# Altium PCB PCB.PcbDoc
Units mil, origin at the board's own origin, x right, y up, seen from the top; angles counter-clockwise.
Board outline 6000 x 4000 mil, 2 copper layers (Top Layer, Bottom Layer); 32 components, 24 nets, 148 pads, 25 vias.
Unrouted connection lines stored in the file: 84.
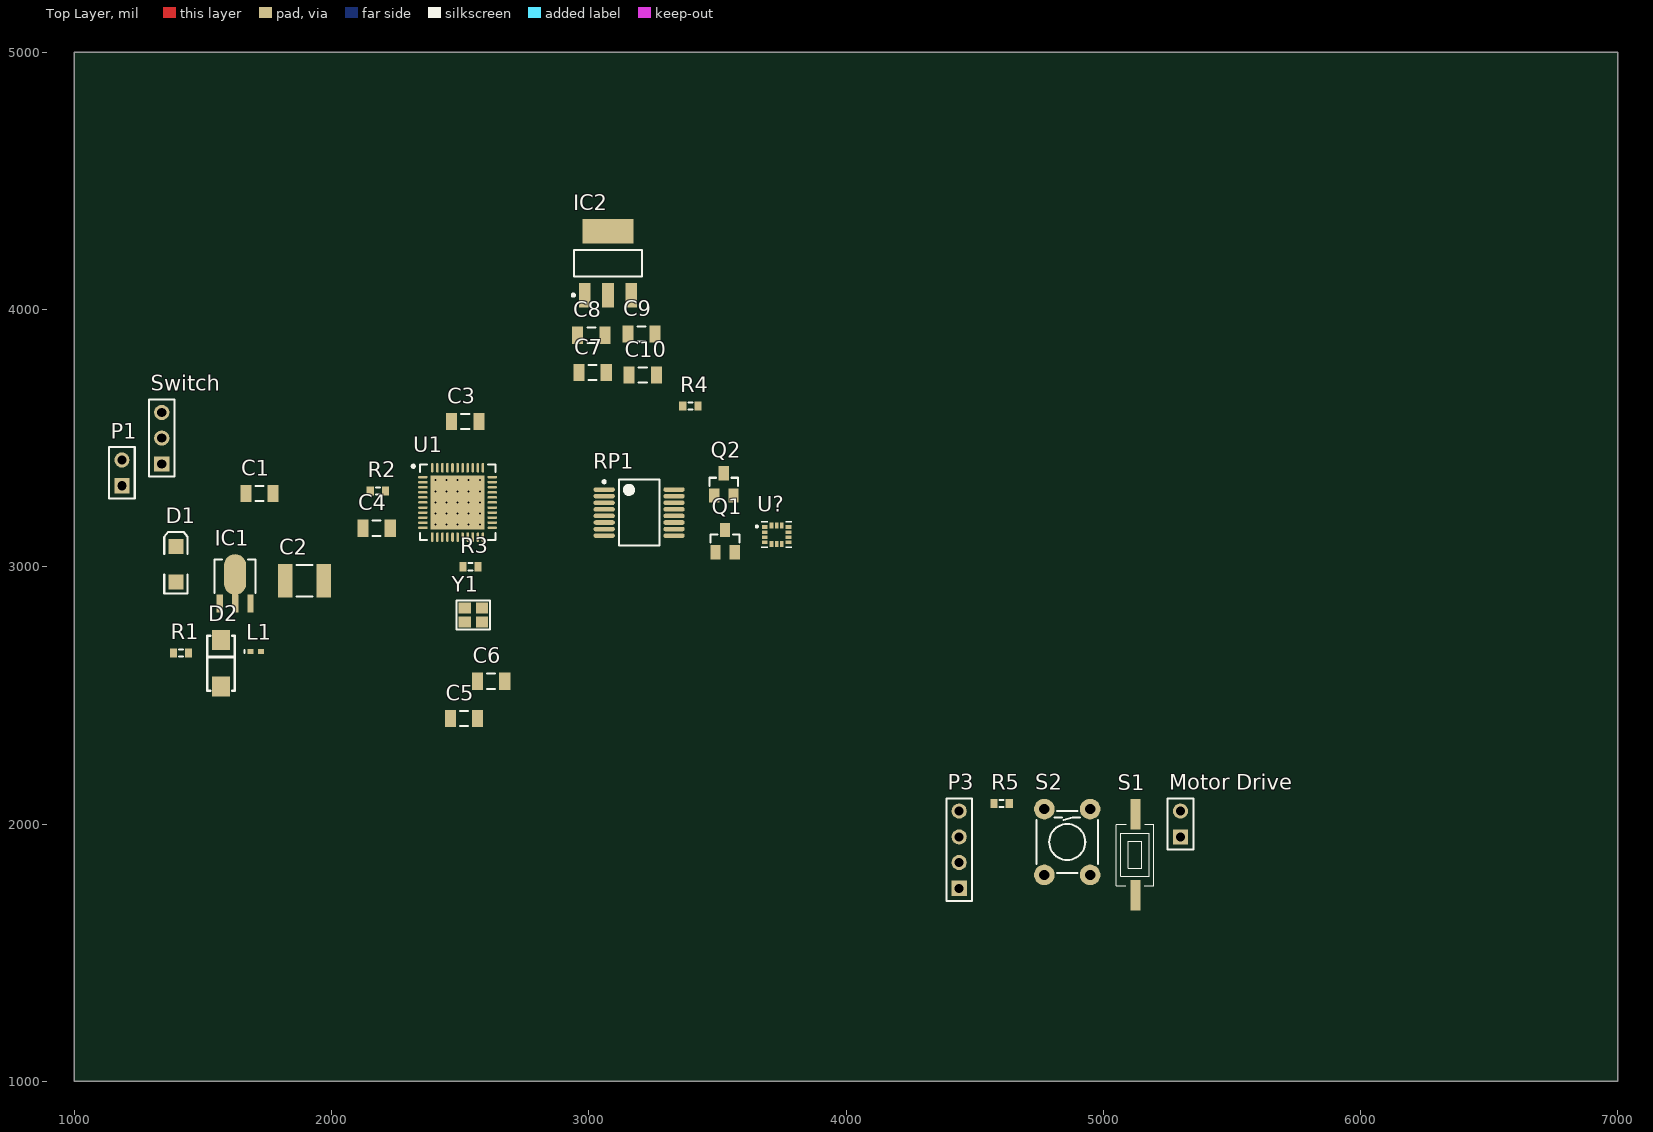
[diagram p0: Top Layer view]
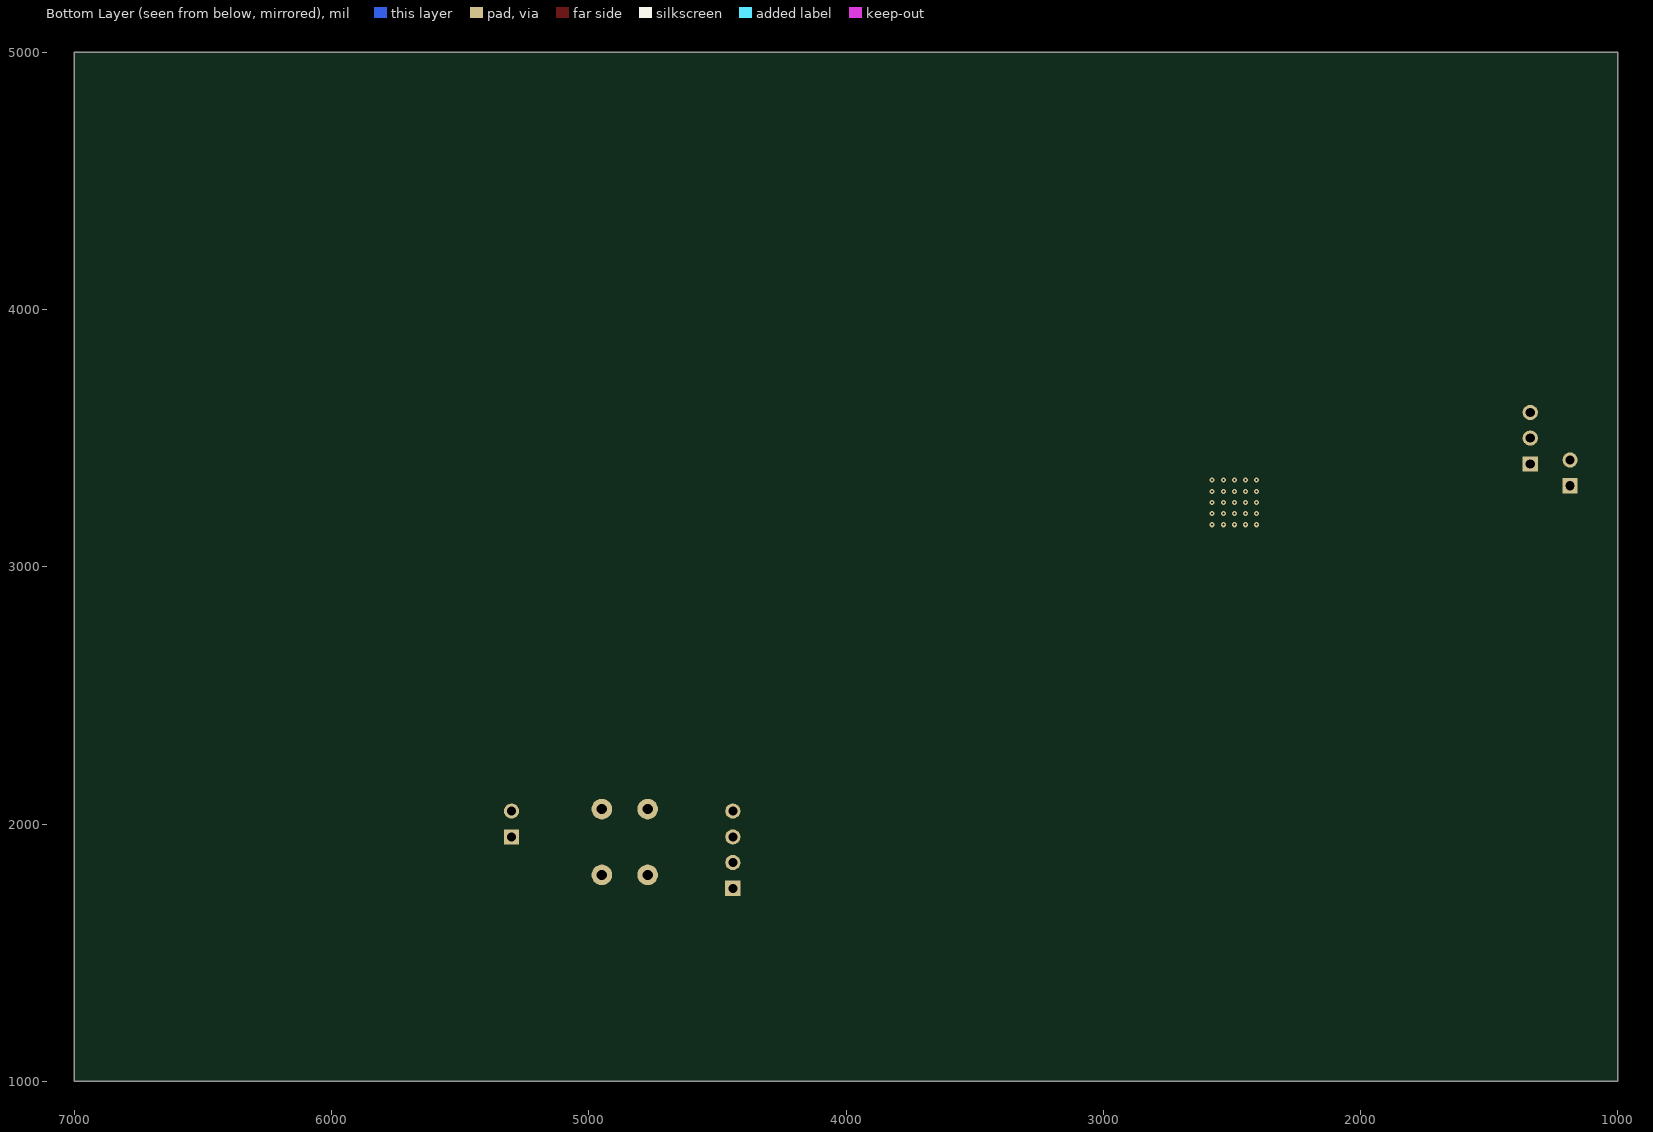
[diagram p1: Bottom Layer view, seen from below]

## Layer stack, top to bottom
Top Solder: solder mask 0.4, Solder Resist, Dk 3.5
Top Layer: signal copper 1.4
Dielectric 1: dielectric 12.6, FR-4, Dk 4.8
Bottom Layer: signal copper 1.4
Bottom Solder: solder mask 0.4, Solder Resist, Dk 3.5

## Board outline
1000,1000 7000,1000 7000,5000 1000,5000

## Design rules (kind name [scope] priority, off if disabled: settings)
Clearance [All] p1: gap=10 ignorepadtopadclearanceinfootprint=FALSE except(0: Arc-Hole Track-Hole SMDPad-Hole THPad-Hole Via-Hole Fill-Hole Poly-Hole Region-Hole Text-Hole)
PolygonConnect [All] p1: connectstyle=Relief reliefconductorwidth=10 reliefentries=4 polygonreliefangle="90 Angle" airgapwidth=10
RoutingVias [All] p1: holewidth=28 width=50 viastyle="Through Hole" minholewidth=28 minwidth=50 maxholewidth=28 maxwidth=50
SolderMaskExpansion [All] p1: expansion=4
Width [All] p1: maxlimit=10 minlimit=10 preferedwidth=10
30 further rules are at their usual default settings.

## Components (designator, comment, footprint, x,y, rotation, side; value= is the part's Value field where it differs from the comment)
C1 "Cap Semi" C1206 1720,3285 r0 top value=100nF-50V
C2 "Cap Pol3" 1812 1895,2945 r0 top value=100uF-16V
C3 "Cap Semi" C1206 2520,3565 r0 top value=104P
C4 "Cap Semi" C1206 2175,3150 r0 top value=1UF
C5 "Cap Semi" C1206 2515,2410 r0 top value=22p
C6 "Cap Semi" C1206 2620,2555 r0 top value=22p
C7 "Cap Semi" C1206 3015,3755 r0 top value=10uF
C8 "Cap Semi" C1206 3010,3900 r0 top value=100nF
C9 "Cap Semi" C1206 3205,3905 r0 top value=10uF
C10 "Cap Semi" C1206 3210,3745 r0 top value=100nF
D1 "LED RED" 3.2X1.6X1.1 1395,3010 r90 top
D2 "1N5819" DO-214AC 1570,2625 r90 top
IC1 "CE8301" SOT-89 1625,2914 r0 top
IC2 "ME6206A30M3G" SOT-223 3075,4180 r0 top
L1 "Inductor" 0402-A 1705.32,2670 r0 top value=47uH
"Motor Drive" "Header 2" HDR1X2 5300,1950 r90 top
P1 "Header 2" HDR1X2 1185,3315 r90 top
P3 "Header 4" HDR1X4 4440,1750 r90 top
Q1 "SI2302" *SOT23 3530,3100 r0 top
Q2 "SI2302" *SOT23 3525,3320 r0 top
R1 "" J1-0603 1415,2665 r0 top value=1K
R2 "Res3" J1-0603 2180,3295 r0 top value=10K
R3 "Res3" J1-0603 2540,3000 r0 top value=1M
R4 "Res3" J1-0603 3395,3625 r0 top value=10K
R5 "Res3" J1-0603 4605,2080 r0 top value=10K
RP1 "Res Pack4" SSOP16_N 3195.82,3210.43 r0 top value=10K
S1 "Switch" TD-19XA 5125,1880 r90 top
S2 "Switch" Switch1 4860,1930 r0 top
Switch "Header 3" HDR1X3 1340,3400 r90 top
U1 "ATmega32U4-MU" 44PW_N 2490,3250 r0 top
U? "BMI160" *PQFN50P300X250X88-14N 3730,3125 r0 top
Y1 "Crystal, 16MHz, 16pF, ±20ppm, case 2520, -40...+85°C" "OSC: 2520" 2518.07,2784.88 r0 top

## Footprints (in the part's own frame and the unit in brackets; to place one, negate y for a bottom-side part, rotate by r counter-clockwise, add the part's x,y. Pads: shape width x height; smd on the part's side, far side on the other; paste and mask are expansions set on the pad)
3.2X1.6X1.1 [mm] "SMT LED; 2 Flat Leads"
  rect 1.5x1.5 smd: 1(-1.75,0) 2(1.75,0)
  silkscreen extent -2.9,-1.15 3.2,1.15
44PW_N [mm] "QFN, 44-Leads, Body 7x7mm, Pitch 0.5mm, Thermal Pad 5.3x5.3mm, IPC Medium Density"
  oval 0.95x0.25 smd: 1(-3.425,2.5) 2(-3.425,2) 3(-3.425,1.5) 4(-3.425,1) 5(-3.425,0.5) 6(-3.425,0) 7(-3.425,-0.5) 8(-3.425,-1) 9(-3.425,-1.5) 10(-3.425,-2) 11(-3.425,-2.5) 23(3.425,-2.5) 24(3.425,-2) 25(3.425,-1.5) 26(3.425,-1) 27(3.425,-0.5) 28(3.425,0) 29(3.425,0.5) 30(3.425,1) 31(3.425,1.5) 32(3.425,2) 33(3.425,2.5)
  oval 0.25x0.95 smd: 12(-2.5,-3.425) 13(-2,-3.425) 14(-1.5,-3.425) 15(-1,-3.425) 16(-0.5,-3.425) 17(0,-3.425) 18(0.5,-3.425) 19(1,-3.425) 20(1.5,-3.425) 21(2,-3.425) 22(2.5,-3.425) 34(2.5,3.425) 35(2,3.425) 36(1.5,3.425) 37(1,3.425) 38(0.5,3.425) 39(0,3.425) 40(-0.5,3.425) 41(-1,3.425) 42(-1.5,3.425) 43(-2,3.425) 44(-2.5,3.425)
  rect 5.3x5.3 smd: 45(0,0)
  silkscreen extent -4.5,-3.72 3.72,3.73, body extent -3.57,-3.57 3.57,3.57, height 0.9
0402-A [mm] "Chip Inductor, Body 1.0x0.5mm, IPC High Density"
  rect 0.6x0.5 smd: 1(-0.5,0) 2(0.5,0)
  silkscreen extent -1.1,-0.15 -1.1,0.15, body extent -0.55,-0.3 0.55,0.3, height 0.55
1812 [mm] "Chip Capacitor, Body 4.5x3.2mm, IPC High Density"
  rect 1.4x3.3 smd: 1(-1.9,0) 2(1.9,0)
  silkscreen extent -0.8,-1.55 0.8,1.55, body extent -2.4,-1.7 2.4,1.7, height 1.4
*PQFN50P300X250X88-14N [mm]
  rect 0.59x0.35 smd: 1(-1.165,0.75) 2(-1.165,0.25) 3(-1.165,-0.25) 4(-1.165,-0.75) 8(1.165,-0.75) 9(1.165,-0.25) 10(1.165,0.25) 11(1.165,0.75)
  rect 0.35x0.59 smd: 5(-0.5,-0.915) 6(0,-0.915) 7(0.5,-0.915) 12(0.5,0.915) 13(0,0.915) 14(-0.5,0.915)
  silkscreen extent -2.05,-1.25 1.5,1.25
*SOT23 [mm]
  rect 1x1.4 smd: 1(-0.95,-1.1) 2(0.95,-1.1) 3(0,1.1)
  silkscreen extent -1.42,-0.15 1.42,0.66
C1206 [mm] "Chip Capacitor, Body 3.2x1.6mm, IPC High Density"
  rect 1.1x1.7 smd: 1(-1.35,0) 2(1.35,0)
  silkscreen extent -0.4,-0.75 0.4,0.75, body extent -1.7,-0.9 1.7,0.9, height 1.3
DO-214AC [mm]
  rect 2x1.75 smd: 1(-2.3,0) 2(2.3,0)
  silkscreen extent -2.7,-1.35 2.7,1.35, body extent -2.74,-1.52 2.74,1.27, height 2.3
HDR1X2 [mm] "Connector; Header; 2 Position"
  rect 1.5x1.5 hole 0.9: 1(0,0)
  round 1.5 hole 0.9: 2(2.54,0)
  silkscreen extent -1.27,-1.27 3.81,1.27
HDR1X3 [mm] "Connector; Header; 3 Position"
  rect 1.5x1.5 hole 0.9: 1(0,0)
  round 1.5 hole 0.9: 2(2.54,0) 3(5.08,0)
  silkscreen extent -1.27,-1.27 6.35,1.27
HDR1X4 [mm] "Connector; Header; 4 Position"
  rect 1.5x1.5 hole 0.9: 1(0,0)
  round 1.5 hole 0.9: 2(2.54,0) 3(5.08,0) 4(7.62,0)
  silkscreen extent -1.27,-1.27 8.89,1.27
J1-0603 [mm] "Chip Resistor, Body 1.6x0.8mm, IPC High Density"
  rect 0.7x0.9 smd: 1(-0.75,0) 2(0.75,0)
  silkscreen extent -0.2,-0.35 0.2,0.35, body extent -0.85,-0.48 0.85,0.48, height 0.9
"OSC: 2520" [mm]
  rect 1.2x1.1 smd: 1(0,0) 2(1.7,0) 3(1.7,1.4) 4(0,1.4)
  round 0.5 on Mech1: 5(-0.075,0.025)
  round 0.5 on Top Overlay: ""(-1.275,-0.6)
  silkscreen extent -0.8,-0.75 2.5,2.15, body extent -0.45,-0.35 2.15,1.75, height 0.55
SOT-89 [mil]
  rect 25x70 smd: 1(-60,-56) 2(0,-56) 3(60,-56)
  oval 86.61x157.48 smd: 2(0,56)
  silkscreen extent -80,-16 80,114, body extent -89,-68 88,99, height 61
SOT-223 [mm]
  rect 1.15x2.4 smd: 1(-2.3,-3.15) 2(0,-3.15) 3(2.3,-3.15)
  rect 5x2.4 smd: 2(0,3.15)
  silkscreen extent -3.55,-3.27 3.35,1.3, body extent -3.41,-3.45 3.3,3.7, height 2.66
SSOP16_N [mm] "SOP, 16-Leads, Body 6.2x5.3mm, Pitch 0.65mm, IPC Medium Density"
  oval 2.1x0.45 smd: 1(-3.45,2.275) 2(-3.45,1.625) 3(-3.45,0.975) 4(-3.45,0.325) 5(-3.45,-0.325) 6(-3.45,-0.975) 7(-3.45,-1.625) 8(-3.45,-2.275) 9(3.45,-2.275) 10(3.45,-1.625) 11(3.45,-0.975) 12(3.45,-0.325) 13(3.45,0.325) 14(3.45,0.975) 15(3.45,1.625) 16(3.45,2.275)
  silkscreen extent -3.57,-3.25 2,3.25, body extent -2.7,-3.25 2.7,3.25, height 2
Switch1 [mil]
  round 80 hole 40: 1(-89,-128) 1(-89,128) 2(89,-128) 2(89,128)
  silkscreen extent -120,-120 120,120, body extent -118,-162 118,162, height 213
TD-19XA [mm]
  rect 3x1 smd: 1(-4,0) 2(4,0)
  silkscreen extent -3.06,-1.83 3.04,1.88, body extent -3.92,-1.85 3.97,2, height 2.5

## Part data
C1 C3 C4 C5 C6 C7 C8 C9 C10: "Capacitor (Semiconductor SIM Model)", LatestRevisionDate=29-May-2009, LatestRevisionNote="IPC-7351 Footprint Added.", PackageDescription="Chip Capacitor", PackageReference=C1206, Published=8-Jun-2000, Publisher="Altium Limited"
C2: "Polarized Capacitor (Surface Mount)", LatestRevisionDate=29-May-2009, LatestRevisionNote="IPC-7351 Footprint Added.", PackageDescription="Chip Capacitor", PackageReference=C0805, Published=8-Jun-2000, Publisher="Altium Limited"
D1: library part LED2, "Typical RED, GREEN, YELLOW, AMBER GaAs LED", LatestRevisionDate=17-Jul-2002, LatestRevisionNote="Re-released for DXP Platform.", PackageDescription="SM LED; 2 Flat Leads", PackageReference=3.2X1.6X1.1, PackageVersion=Feb-2002, Published=8-Jun-2000, Publisher="Altium Limited"
D2: library part "Diode Schottky"
IC2: library part ASM1117
"Motor Drive" P1: "Header, 2-Pin", LatestRevisionDate=17-Jul-2002, LatestRevisionNote="Re-released for DXP Platform.", Publisher="Altium Limited"
P3: "Header, 4-Pin", LatestRevisionDate=17-Jul-2002, LatestRevisionNote="Re-released for DXP Platform.", Publisher="Altium Limited"
Q1 Q2: Package="SOT-23-3 Vishay Siliconix", Availability=Unavailable, MF="Vishay Siliconix", MP=SI2302, Price=None, SnapEDA_Link=https://www.snapeda.com/parts/SI2302/Vishay%20Siliconix/view-part/?ref=snap
R1: library part Res3, "Resistor", LatestRevisionDate=29-May-2009, LatestRevisionNote="IPC-7351 Footprint Added.", PackageDescription="Chip Resistor", PackageReference=J1-0603, Published=8-Jun-2000, Publisher="Altium Limited"
R2 R3 R4 R5: "Resistor", LatestRevisionDate=29-May-2009, LatestRevisionNote="IPC-7351 Footprint Added.", PackageDescription="Chip Resistor", PackageReference=J1-0603, Published=8-Jun-2000, Publisher="Altium Limited"
RP1: "Isolated Resistor Network", Code_IPC=SOP65P780-16, Code_JEDEC=MO-150-AC, LatestRevisionDate=29-May-2009, LatestRevisionNote="IPC-7351 Footprint Added.", PackageDescription="16-Pin Plastic Small Outline Package 0.65 mm Pitch", PackageReference=SSOP16, PackageVersion=Oct-2003, Published=24-Mar-1999, Publisher="Altium Limited"
Switch: "Header, 3-Pin", LatestRevisionDate=17-Jul-2002, LatestRevisionNote="Re-released for DXP Platform.", Publisher="Altium Limited"
U1: "8-bit AVR Microcontroller, 2.7-5.5V, 16MHz, 32KB Flash, 1KB EEPROM, 2.5KB SRAM, USB Controller, 44-pin QFN, Industrial Grade (-40°C to 85°C), Ext Osc", Code_JEDEC=MO-220-VKKD-1, ComponentLink1Description="Manufacturer URL", ComponentLink1URL=http://www.atmel.com/, ComponentLink2Description="ATmega16U4/32U4 Datasheet", ComponentLink2URL=http://www.atmel.com/dyn/resources/prod_documents/doc7766.pdf, ComponentLink3Description="ATmega16U4 ATmega32U4 Summary", ComponentLink3URL=http://www.atmel.com/dyn/resources/prod_documents/7766S.pdf, DatasheetVersion="revF, Nov-2010", PackageDescription="44-Pin Quad Flat No-Lead Package, 7 x 7 mm Body, 0.5 mm Pitch (QFN)", PackageReference=44PW, PackageVersion="revG, Sep-2009"
U?: "BMI160 2.5 x 3 mm Tiaxial Accelerometer / Gyroscope Inertial Measurement Unit", Package="LGA-14 Bosch", Availability=Unavailable, MF=Bosch, MP=BMI160, Price=None, SnapEDA_Link=https://www.snapeda.com/parts/BMI160/Bosch%20Sensortec/view-part/?ref=snap
Y1: library part Crystal_2520, Frequency=16MHz, LoadCapacitance=16pF, Manufacturer=Epson, Package="case 2520", PartNumber="FA-20H 16.0000MF20X-B", Temperature=-40...+85°C, Tolerance=±20ppm, ValueManufacturerPartNumber="Crystal, 16MHz, 16pF, ±20ppm, case 2520, -40...+85°", HelpURL=https://www.digikey.com/product-detail/en/epson/FA-20H-16.0000MF20X-B/SER4202-ND/7430937, TypeOscilator=Crystal
L1: Code_IEC=1005, Code_JEITA=0402, LatestRevisionDate=29-May-2009, LatestRevisionNote="IPC-7351 Footprint Added.", PackageDescription="Chip Inductor", PackageReference=0402-A, Published=8-Jun-2000, Publisher="Altium Limited"

## Via types
v1: diameter 19.68, hole 7.87, Top Layer to Bottom Layer, 25 vias

## Nets (pads, with @x,y where several pads share a name; then routed paths per layer and width w, separated by ;. In a path a pad name is that pad's centre, name@x,y a point inside that pad or via, vN(x,y) a via of type N, cw(c..) or ccw(c..) an arc to the next point about the centre after c; other vN are vias at no path point)
+3: C9.2 C10.2 IC2.2 Q1.1 Q2.1 R4.2 RP1.5 RP1.6 U?.5 U?.8
+5: C2.1 C7.2 C8.2 D2.2 IC1.3 IC2.3 P3.1 R2.1 R5.1 RP1.9 RP1.10 U1.2 U1.7 U1.14 U1.24 U1.34 U1.44
GND: "Motor Drive.1" C1.1 C2.2 C3.2 C4.1 C5.2 C6.2 C7.1 C8.1 C9.1 C10.1 D1.2 IC1.1 IC2.1 P1.1 S1.1 S2.1 U1.5 U1.15 U1.23 U1.35 U1.43 U1.45 U?.6 U?.7
  other v1: 2403.38,3163.39 2446.69,3163.39 2490,3163.39 2533.31,3163.39 2576.61,3163.39 2403.38,3206.69 2446.69,3206.69 2490,3206.69 2533.31,3206.69 2576.61,3206.69 2403.38,3250 2446.69,3250 2490,3250 2533.31,3250 2576.61,3250 2403.38,3293.31 2446.69,3293.31 2490,3293.31 2533.31,3293.31 2576.61,3293.31 2403.38,3336.61 2446.69,3336.61 2490,3336.61 2533.31,3336.61 2576.61,3336.61
NetC1_2: C1.2 L1.1 R1.2 Switch.3
NetC3_1: C3.1 U1.42
NetC4_2: C4.2 U1.6
NetC5_1: C5.1 Y1.4
NetC6_1: C6.1 Y1.2
NetD1_1: D1.1 R1.1
NetD2_1: D2.1 IC1.2 L1.2
"NetMotor Drive_2": "Motor Drive.2" U1.30
NetP3_2: P3.2 U1.11
NetP3_3: P3.3 U1.10
NetP3_4: P3.4 U1.9
NetQ1_2: Q1.2 RP1.11 U?.14
NetQ1_3: Q1.3 RP1.8 U1.18
NetQ2_2: Q2.2 RP1.12 U?.13
NetQ2_3: Q2.3 RP1.7 U1.19
NetR2_2: R2.2 S1.2 U1.13
NetR3_1: R3.1 U1.17 Y1.1
NetR3_2: R3.2 U1.16 Y1.3
NetR4_1: R4.1 U?.12
NetR5_2: R5.2 S2.2 U1.29
Vin: P1.2 Switch.2
pads on no net: RP1.1 RP1.2 RP1.3 RP1.4 RP1.13 RP1.14 RP1.15 RP1.16 Switch.1 U1.1 U1.3 U1.4 U1.8 U1.12 U1.20 U1.21 U1.22 U1.25 U1.26 U1.27 U1.28 U1.31 U1.32 U1.33 U1.36 U1.37 U1.38 U1.39 U1.40 U1.41 U?.1 U?.2 U?.3 U?.4 U?.9 U?.10 U?.11 Y1. Y1.5